# EAGLE board PM-BAT v0.5-35X22.86-DXF (EAGLE 9.6.2)
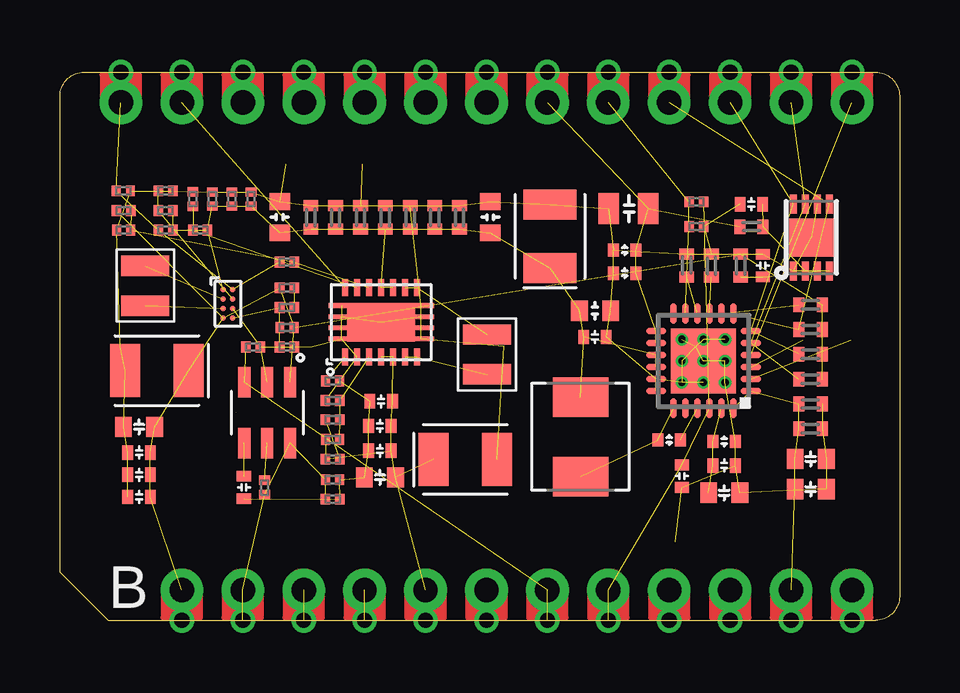
[diagram p0: board, top side]
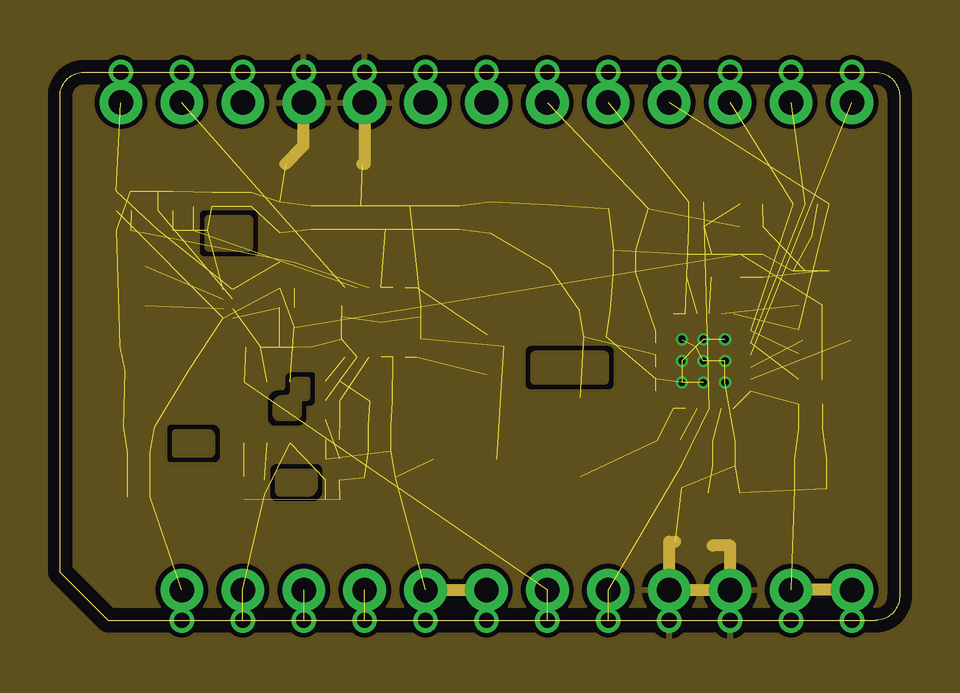
[diagram p1: board, inner layer Route2]
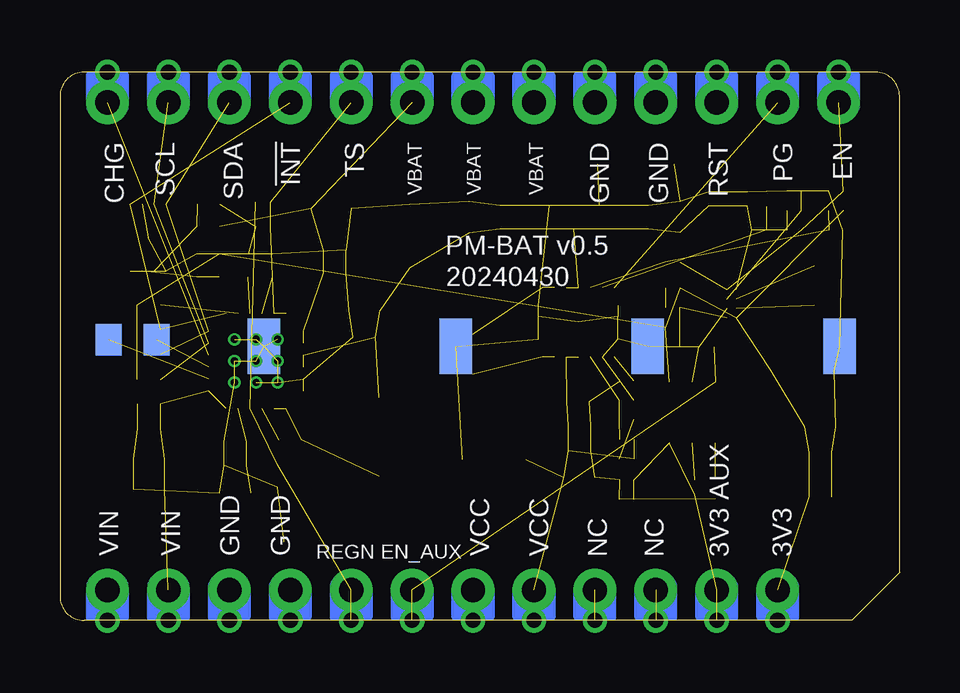
[diagram p2: board, bottom side, seen from below]

Size 35 x 22.86 mm. Coordinates in mm from the lower left corner, seen from the top.
Outline: 2,0 34,0 arc90 35,1 35,21.86 arc90 34,22.86 1,22.86 arc90 0,21.86 0,2 2,0
Copper layers (1+2*15+16): Top 0.035mm / dielectric 1.5mm / Route2 0.035mm / dielectric 0.15mm / Route15 0.035mm / dielectric 0.2mm / Bottom 0.035mm
Design rules "default *": minimum track width 4mil, minimum drill 8mil, track to track 8mil, track to pad 6mil, pad to pad 6mil, via to via 6mil, smd to smd 6mil, copper to edge 20mil, drill to drill 6mil, minimum pad ring 4mil, minimum via ring 4mil, stop-mask expansion 0.01mm, vias tented up to drill 16mil, thermal gap 10mil
Net classes: 0 default: width 0.152 mm, drill 0.203 mm, clearance 0.152 mm; 1 power: width 0.305 mm, drill 0.203 mm, clearance 0.203 mm; 3 BAT: drill 0.203 mm, clearance 0.203 mm; 4 3V3: width 0.305 mm, drill 0.203 mm, clearance 0.508 mm; 6 +3V3: width 0.203 mm, drill 0.203 mm, clearance 0.152 mm

## Footprints (pad centres in the part's own frame; a part is rotated, then mirrored left to right if it is on the bottom)
C0402_B = smd 0.457 x 0.61: 1 -0.483,0; 2 0.483,0
C-0402 = smd 0.45 x 0.55: 1 -0.47,0; 2 0.47,0
C0805 = smd 0.85 x 1.3: 1 -0.8,0; 2 0.85,0
C0402 = smd 0.45 x 0.6: 1 -0.47,0; 2 0.47,0
C0201-N = smd 0.37 x 0.45: 1 -0.295,0; 2 0.295,0
C0603 = smd 0.7 x 0.85: 1 -0.65,0; 2 0.65,0
C-0603A = smd 0.7 x 0.85: 1 -0.65,0; 2 0.65,0
CASE-B = smd 2.2 x 1.25: P$1 0,-1.32; P$2 0,1.32
1X13-CASTELLATED = drill 1.016 pad 1.778: 1 0,-15.24; 2 0,-12.7; 3 0,-10.16; 4 0,-7.62; 5 0,-5.08; 6 0,-2.54; 7 0,0; 8 0,2.54; 9 0,5.08; 10 0,7.62; 11 0,10.16; 12 0,12.7; 13 0,15.24 | drill 0.635 pad 1.016: @1 1.27,-15.24; @2 1.27,-12.7; @3 1.27,-10.16; @4 1.27,-7.62; @5 1.27,-5.08; @6 1.27,-2.54; @7 1.27,0; @8 1.27,2.54; @9 1.27,5.08; @10 1.27,7.62; @11 1.27,10.16; @12 1.27,12.7; @13 1.27,15.24
1X12-CASTELLATED = drill 1.016 pad 1.778: 1 0,-13.97; 2 0,-11.43; 3 0,-8.89; 4 0,-6.35; 5 0,-3.81; 6 0,-1.27; 7 0,1.27; 8 0,3.81; 9 0,6.35; 10 0,8.89; 11 0,11.43; 12 0,13.97 | drill 0.635 pad 1.016: @1 1.27,-13.97; @2 1.27,-11.43; @3 1.27,-8.89; @4 1.27,-6.35; @5 1.27,-3.81; @6 1.27,-1.27; @7 1.27,1.27; @8 1.27,3.81; @9 1.27,6.35; @10 1.27,8.89; @11 1.27,11.43; @12 1.27,13.97
INDUCTOR-2520 = smd 0.85 x 2: 1 -0.83,0; 2 0.83,0
INDUCTOR-4040 = smd 1.65 x 2.3: P$1 -1.65,0; P$2 1.65,0
R0201-N = smd 0.4 x 0.45: 1 -0.305,0; 2 0.305,0
R0402_B = smd 0.457 x 0.61: 1 -0.483,0; 2 0.483,0
TP-1311MM = smd 1.1 x 1.3: P$1 0,0
ELECTRON_QFN24 = smd 0.85 x 0.28: 1 -1.975,1.25; 2 -1.975,0.75; 3 -1.975,0.25; 4 -1.975,-0.25; 5 -1.975,-0.75; 6 -1.975,-1.25; 13 1.975,-1.25; 14 1.975,-0.75; 15 1.975,-0.25; 16 1.975,0.25; 17 1.975,0.75; 18 1.975,1.25 | smd 0.28 x 0.85: 7 -1.25,-1.975; 8 -0.75,-1.975; 9 -0.25,-1.975; 10 0.25,-1.975; 11 0.75,-1.975; 12 1.25,-1.975; 19 1.25,1.975; 20 0.75,1.975; 21 0.25,1.975; 22 -0.25,1.975; 23 -0.75,1.975; 24 -1.25,1.975 | smd 2.7 x 2.7: PAD 0,0 | drill 0.3 pad 0.406: PAD@1 -0.9,0.9; PAD@2 0,0.9; PAD@3 0.9,0.9; PAD@4 -0.9,0; PAD@5 0,0; PAD@6 0.9,0; PAD@7 -0.9,-0.9; PAD@8 0,-0.9; PAD@9 0.9,-0.9
TPS63020 = smd 0.25 x 0.7: 1 -1.5,-1.45; 2 -1,-1.45; 3 -0.5,-1.45; 4 0,-1.45; 5 0.5,-1.45; 6 1,-1.45; 7 1.5,-1.45; 8 1.5,1.45; 9 1,1.45; 10 0.5,1.45; 11 0,1.45; 12 -0.5,1.45; 13 -1,1.45; 14 -1.5,1.45 | smd 1.1 x 0.2: 15 -1.65,0.69; 16 -1.65,0.23; 17 -1.65,-0.23; 18 -1.65,-0.69; 19 1.65,-0.69; 20 1.65,-0.23; 21 1.65,0.23; 22 1.65,0.69 | smd 2.85 x 1.58: 23 0,0
DSBGA = smd 0.23 x 0.23: A1 -0.2,0.6; A2 0.2,0.6; B1 -0.2,0.2; B2 0.2,0.2; C1 -0.2,-0.2; C2 0.2,-0.2; D1 -0.2,-0.6; D2 0.2,-0.6
SOT-23-6 = smd 1.27 x 0.508: 1 -1.27,0.953; 2 -1.27,0; 3 -1.27,-0.953; 4 1.27,-0.953; 5 1.27,0; 6 1.27,0.953
SPARKFUN-POWERIC_TDFN-8 = smd 0.8 x 0.3: 1 -1.4,0.75; 2 -1.4,0.25; 3 -1.4,-0.25; 4 -1.4,-0.75; 5 1.4,-0.75; 6 1.4,-0.25; 7 1.4,0.25; 8 1.4,0.75 | smd 1.6 x 1.88: EP 0,0
TP_2.33X1.37 = smd 1.37 x 2.33: 1 0,0

## Placement (x,y rotation side)
C1  100pF  [C0402_B]  14.6,16.81 270 top
C2  47nF  [C-0402]  25.4,7.52 180 top
C3  10uF  [C0805]  23.72,17.17 180 top
C4  1000pF  [C0402_B]  15.63,16.81 270 top
C5  10nF  [C0402]  29.3,14.79 90 top
C6  1uF  [C0402]  28.82,17.36 180 top
C7  1000pF,25V  [C0402]  7.67,5.54 270 top
C8  0.1nF  [C0402_B]  16.66,16.81 270 top
C9  0.1uF  [C0402_B]  31.29,7.99 180 top
C10  0.1uF  [C0201-N]  11.37,5.87 0 top
C11  1000pF  [C0402_B]  31.29,9.03 180 top
C12  22uF 10V  [C0603]  9.16,16.81 90 top
C13  100nF  [C0201-N]  7.97,17.57 90 top
C14  NC  [C0201-N]  9.46,12.22 180 top
C15  2.2uF,25V  [C-0603A]  31.29,6.73 0 top
C16  22uF  [C-0603A]  3.3,8.07 180 top
C17  0.1uF  [C0402]  27.69,6.46 180 top
C18  100pF  [C0402]  3.3,6.07 180 top
C19  1nF  [C0402]  3.3,7 180 top
C20  1000pF  [C0201-N]  7.16,17.57 90 top
C21  10pF  [C0402_B]  13.56,16.81 270 top
C22  10pF  [C0201-N]  6.35,17.57 90 top
C23  1000pF  [C0402_B]  11.49,16.81 270 top
C24  0.1uF  [C0402]  3.3,5.15 180 top
C25  10nF  [C0201-N]  2.64,17.91 0 top
C26  22uF 10V  [C0603]  17.94,16.81 90 top
C27  100nF  [C0402_B]  12.53,16.81 270 top
C28  NC  [C0201-N]  11.37,7.54 0 top
C29  10pF  [C0402_B]  10.46,16.81 270 top
C30  22uF  [C-0603A]  13.34,5.96 180 top
C31  1nF  [C0402]  13.39,9.14 180 top
C32  100pF  [C0402]  13.34,8.11 180 top
C35  0.1uF  [C0402]  13.34,7.07 180 top
C36  100nF  [C0201-N]  11.37,9.98 0 top
C37  4.7uF  [C0402]  25.93,6.02 270 top
C47  100nF  [C0201-N]  2.66,16.27 180 top
C49  10uF,25V  [C-0603A]  27.69,5.32 0 top
C57  10uF  [C-0603A]  31.29,5.47 0 top
C58  0.1uF  [C0402]  22.3,11.81 0 top
C59  22uF  [C0603]  22.3,12.91 0 top
C72  0.1uF  [C-0402]  23.54,14.48 180 top
C73  1000pF  [C-0402]  23.54,15.44 180 top
C74  1000p  [C-0402]  27.69,7.47 180 top
C100  220uF,10V  [CASE-B]  20.43,16.02 0 top
C101  220uF.6V  [CASE-B]  4.04,10.41 90 top
C102  220uF,6V  [CASE-B]  16.89,6.71 270 top
J1  M13PTH-CST-R  [1X13-CASTELLATED]  17.78,21.59 90 top
J2  M12PTH-CST-R  [1X12-CASTELLATED]  19.05,1.27 270 top
L1  1.5uH  [INDUCTOR-2520]  3.56,13.95 270 top
L3  1.5uH  [INDUCTOR-2520]  17.8,11.09 270 top
L7  2.2uH  [INDUCTOR-4040]  21.7,7.65 90 top
R1  100K  [R0201-N]  8.05,11.4 0 top
R2  10K  [R0402_B]  31.29,12.13 180 top
R3  10K  [R0402_B]  31.29,13.16 180 top
R4  1.1M  [R0201-N]  11.37,6.72 180 top
R5  180K  [R0201-N]  11.37,9.18 0 top
R6  62K  [R0201-N]  11.37,8.37 180 top
R7  150  [R0402_B]  28.37,14.79 270 top
R8  510K  [R0201-N]  9.46,13.87 180 top
R9  91K  [R0201-N]  9.46,11.4 180 top
R10  10K  [R0402_B]  27.15,14.79 270 top
R11  10K  [R0201-N]  8.53,5.54 90 top
R12  10K/NC  [R0201-N]  11.37,5.05 0 top
R13  100K/NC  [R0201-N]  4.4,17.91 0 top
R14  100K  [R0201-N]  4.4,16.27 180 top
R16  100K  [R0201-N]  4.4,17.08 180 top
R17  18K  [R0201-N]  9.46,13.04 0 top
R18  10K  [R0201-N]  9.46,14.94 180 top
R23  1M  [R0201-N]  5.85,16.27 180 top
R24  NC  [R0201-N]  5.55,17.57 90 top
R28  1M  [R0201-N]  2.66,17.08 180 top
R30  4K7  [R0402_B]  31.29,10.05 180 top
R33  160R  [R0402_B]  26.13,14.79 90 top
R34  49.9K  [R0201-N]  26.53,16.42 180 top
R35  27.4K  [R0201-N]  26.53,17.45 0 top
R36  4K7  [R0402_B]  31.29,11.1 180 top
R54  1K  [R0402_B]  28.82,16.42 0 top
TP1  TP1311MM  [TP-1311MM]  32.97,11.7 180 bottom
TP2  TP1311MM  [TP-1311MM]  30.97,11.7 180 bottom
U1  BQ24195  [ELECTRON_QFN24]  26.83,10.82 180 top
U2  TPS63020  [TPS63020]  13.39,12.43 0 top
U3  TPS631011  [DSBGA]  7.01,13.2 0 top
U5  TPS22918  [SOT-23-6]  8.64,8.66 270 top
U6  SPARKFUN-POWERIC_MAX1704X  [SPARKFUN-POWERIC_TDFN-8]  31.32,15.96 90 top
U$1  TP  [TP_2.33X1.37]  2.5,11.43 0 bottom
U$2  TP  [TP_2.33X1.37]  10.5,11.43 0 bottom
U$4  TP  [TP_2.33X1.37]  18.5,11.43 0 bottom
U$5  TP  [TP_2.33X1.37]  26.5,11.43 0 bottom

## Library data of the parts
C1 = Particle; ITEM_NAME: CAP CER 100pF 50V X7R 0402 10%; ITEM_NUMBER: PT-200138
C2 = particle SZ; ITEM_NAME: CAP CER 0.1uF 16V X7R 0402 10%; ITEM_NUMBER: PT-200005
C3 C13 C14 C20 C22 C25 C28 C36 C37 C47 C58 C59 = particle SZ; ITEM_NAME: CAP CER 10uF 6.3V X5R 0603 10% Low ESR<70mohms; ITEM_NUMBER: PT-200209
C4 C23 = Particle; ITEM_NAME: CAP CER 1000PF 50V X7R 0402 10%
C5 = particle SZ; ITEM_NAME: CAP CER 10nF 16V X5R 0402 10%; ITEM_NUMBER: PT-200136
C6 = particle SZ; ITEM_NAME: CAP CER X5R 1uF 0402 10V ±10% ROHS; ITEM_NUMBER: PT-200695
C7 C15 C49 C57 = particle SZ; ITEM_NAME: CAP CER 100PF 50V C0G/NP0 0603 5%; ITEM_NUMBER: PT-200458
C8 C27 = Particle; ITEM_NAME: CAP CER 0.1UF 16V X7R 0402 10%; ITEM_NUMBER: PT-200649
C9 = Particle; ITEM_NAME: CAP CER 0.1UF 25V X7R 0402 20%; ITEM_NUMBER: PT-200690
C10 C24 C35 = particle SZ; ITEM_NAME: 0.1UF 16V X7R 0402 10%; ITEM_NUMBER: PT-200649
C11 = Particle; ITEM_NAME: CAP CER 1000PF 50V X7R 0402 10%; ITEM_NUMBER: PT-200631
C12 C26 = particle SZ; ITEM_NAME: CAP CER 0.1UF 16V X7R 0402 10%; ITEM_NUMBER: 120-00060
C16 C30 = particle SZ; ITEM_NAME: CAP CER 22UF 10V X5R 0603 20%; ITEM_NUMBER: 120-00061
C17 = RedBear; ITEM_NAME: CAP CER 0.1UF 25V X7R 0402 20%; ITEM_NUMBER: PT-200690
C18 C32 = particle SZ; ITEM_NAME: 100pF 50V X7R 0402 10%; ITEM_NUMBER: PT-200138
C19 C31 C73 = particle SZ; ITEM_NAME: 1000PF 50V X7R 0402 10%; ITEM_NUMBER: PT-200631
C21 C29 = Particle; ITEM_NAME: CAP CER 10PF 5% 50V C0G/NP0 0402; ITEM_NUMBER: 120-00038
C72 = particle SZ; ITEM_NAME: CAP CER 0.1UF 16V X7R 0402 10%; ITEM_NUMBER: PT-200649
C74 = particle SZ; ITEM_NAME: CAP CER 1000PF 50V X7R 0402 10%; ITEM_NUMBER: PT-200631
C100-C102 R4-R6 R9 R18 R24 R28 R34 R35 TP1 TP2 U2 U3 U5 = particle SZ
J1 J2 L1 L3 R7 R33 U$1 U$2 U$4 U$5 = Particle
L7 = Particle; ITEM_NAME: FIXED IND 1UH 5.8A 26 MOHM SMD 4020; ITEM_NUMBER: 155-00005
R1 R8 R13 R14 R16 R23 = particle SZ; ITEM_NAME: RES SMD 1M OHM 1% 1/16W 0402; ITEM_NUMBER: PT-201084
R2 R3 R10 = Spark; ITEM_NAME: 10K OHM 5% 1/16W 0402; ITEM_NUMBER: PT-200004
R11 R12 = particle SZ; ITEM_NAME: 10K OHM 5% 1/16W 0402; ITEM_NUMBER: PT-200004
R17 = particle SZ; ITEM_NAME: RES SMD 24K OHM 1% 1/16W 0402; ITEM_NUMBER: PT-201025
R30 R36 = Particle; ITEM_NAME: RES SMD 4K7 OHM 5% 1/16W 0402; ITEM_NUMBER: PT-200230
R54 = Particle; ITEM_NAME: RES SMD 1K OHM 5% 1/16W 0402; ITEM_NUMBER: PT-200002
U1 U6 = ELEKTRA-PMIC v0.3-35X22.86-0.8-0402

## Nets
3V3: C14.1 C16.1 C18.1 C19.1 C24.1 C101.P$1 J2.1 J2.@1 R2.1 R3.1 R7.1 R8.2 R28.2 R30.1 R36.1 U3.D1 U5.1
3V3_AUX: C10.1 J2.2 J2.@2 R11.1 R12.1 U5.6
!CE: R10.2 U1.9
!FUEL-INT: J1.4 J1.@4 R2.2 U1.7 U6.5
!RST: J1.11 J1.@11
BTST: C2.1 U1.21
CHG: J1.1 J1.@1 U1.4
EN_AUX: J2.7 J2.@7 R1.1 U5.3
ENABLE: C25.1 J1.13 J1.@13 R14.2 R18.2 U3.A2
GND: C1.1 C3.2 C4.1 C5.2 C6.2 C7.2 C8.1 C9.1 C10.2 C11.1 C12.2 C13.2 C15.2 C16.2 C17.1 C18.2 C19.2 C20.2 C21.1 C22.2 C23.1 C24.2 C25.2 C26.2 C27.1 C29.1 C30.2 C31.2 C32.2 C35.2 C36.2 C37.2 C47.2 C49.2 C57.2 C58.2 C59.2 C72.2 C73.2 C74.1 C100.P$2 C101.P$2 C102.P$2 J1.9 J1.10 J1.@9 J1.@10 J2.9 J2.10 J2.@9 J2.@10 R1.2 R5.1 R9.1 R10.1 R12.2 R13.2 R24.2 R33.2 R34.1 U1.17 U1.18 U1.PAD U1.PAD@1 U1.PAD@2 U1.PAD@3 U1.PAD@4 U1.PAD@5 U1.PAD@6 U1.PAD@7 U1.PAD@8 U1.PAD@9 U2.2 U2.15 U2.16 U2.17 U2.18 U2.19 U2.20 U2.21 U2.22 U2.23 U3.C2 U5.2 U6.1 U6.4 U6.6 U6.EP U$1.1 U$2.1 U$4.1 U$5.1
ILIM: R33.1 U1.10
N$1: J2.3 J2.@3
N$2: C17.2 C49.1 C74.2 U1.23
N$4: TP2.P$1 U1.3
N$5: C14.2 R9.2 R17.1 U3.D2
N$6: C28.2 R5.2 R6.1 U2.3
N$7: TP1.P$1 U1.2
N$8: R8.1 R17.2
N$9: R4.1 R6.2
N$10: J2.4 J2.@4
N$11: L3.1 U2.8 U2.9
N$12: L1.1 U3.B1
N$15: R13.1 R16.2 U3.B2
N$16: L3.2 U2.6 U2.7
N$17: L1.2 U3.C1
N$18: C7.1 U5.4
N$19: C36.1 U2.1
N$20: R11.2 U5.5
N$21: C47.1 R18.1 R28.1 U2.12
N$22: R23.2 R24.1 U2.13
N$48: C5.1 R7.2 U6.3
N$49: C6.1 R54.2 U6.2
OTG: R3.2 U1.8
PG: J1.12 J1.@12 U2.14
REGN: C37.1 J2.8 J2.@8 R35.2 U1.22
SCL: J1.2 J1.@2 R30.2 U1.5 U6.7
SDA: J1.3 J1.@3 R36.2 U1.6 U6.8
SW1: C2.2 L7.P$1 U1.19 U1.20
TS: J1.5 J1.@5 R34.2 R35.1 U1.11 U1.12
VBAT: C3.1 C72.1 C73.1 J1.6 J1.7 J1.8 J1.@6 J1.@7 J1.@8 R54.1 U1.13 U1.14
VCC: C28.1 C30.1 C31.1 C32.1 C35.1 C102.P$1 J2.5 J2.6 J2.@5 J2.@6 R4.2 U2.4 U2.5
VIN: C9.2 C11.2 C15.1 C57.1 J2.11 J2.12 J2.@11 J2.@12 U1.1 U1.24
VSYS: C1.2 C4.2 C8.2 C12.1 C13.1 C20.1 C21.2 C22.1 C23.2 C26.1 C27.2 C29.2 C58.1 C59.1 C100.P$1 L7.P$2 R14.1 R16.1 R23.1 U1.15 U1.16 U2.10 U2.11 U3.A1

## Tracks (layer width: path | path; a pad name or v marks a point on that pad's centre or on a via)
3V3  (15 unrouted)
  Route2 0.508: J2.@1 J2.1
  pour Route2: 9.86,10.11 10.31,10.11 arc-90 10.39,10.03 10.39,9.35 arc-90 10.24,9.19 10.16,9.19 arc90 10.03,9.07 10.03,8.66 arc-90 9.73,8.36 9.14,8.36 arc-90 8.92,8.59 8.92,8.99 arc-90 9.27,9.35 9.45,9.35 arc90 9.63,9.53 9.63,9.88 arc-90
  pour Route2: 4.83,7.92 6.17,7.92 arc-90 6.43,7.67 6.43,7.04 arc-90 6.22,6.83 4.8,6.83 arc-90 4.72,6.91 4.72,7.82 arc-90
3V3_AUX  (5 unrouted)
  pour Route2: 9.25,6.27 10.49,6.27 arc-90 10.69,6.07 10.69,5.56 arc-90 10.34,5.21 9.22,5.21 arc-90 9.02,5.41 9.02,6.07 arc-90 9.22,6.27
!CE  (1 unrouted)
!FUEL-INT  (3 unrouted)
  Route2 0.508: J1.@4 J1.4
!RST
  Route2 0.508: J1.@11 J1.11
BTST  (1 unrouted)
CHG  (1 unrouted)
  Route2 0.508: J1.@1 J1.1
EN_AUX  (3 unrouted)
ENABLE  (4 unrouted)
  Route2 0.508: J1.@13 J1.13
GND  (85 unrouted)
  Route2 0.508: 10.14,21.38 10.14,21.59 J1.10 | 10.14,21.38 10.14,19.77 9.4,19.04 | J1.@10 10.16,21.38 10.14,21.38 | J1.@9 J1.9 12.7,19.04 12.6,19.04 | J2.@10 J2.10 | J2.10 27.94,3.13 27.22,3.13 | J2.@9 J2.9 | J2.9 25.4,3.28 25.65,3.28 | J2.9 J2.10
  pour Route2 (rank 4): -3.89,30.63 44.27,30.63 44.27,-3.23 -3.89,-3.23
ILIM  (1 unrouted)
N$1  (1 unrouted)
N$2  (3 unrouted)
N$4  (1 unrouted)
N$5  (3 unrouted)
N$6  (3 unrouted)
N$7  (1 unrouted)
N$8  (1 unrouted)
N$9  (1 unrouted)
N$10  (1 unrouted)
N$11  (2 unrouted)
N$12  (1 unrouted)
N$15  (2 unrouted)
N$16  (2 unrouted)
N$17  (1 unrouted)
N$18  (1 unrouted)
N$19  (1 unrouted)
N$20  (1 unrouted)
N$21  (3 unrouted)
N$22  (2 unrouted)
N$48  (2 unrouted)
N$49  (2 unrouted)
OTG  (1 unrouted)
PG  (1 unrouted)
  Route2 0.508: J1.@12 J1.12
REGN  (4 unrouted)
SCL  (3 unrouted)
  Route2 0.508: J1.@2 J1.2
SDA  (3 unrouted)
  Route2 0.508: J1.@3 J1.3
SW1  (3 unrouted)
TS  (4 unrouted)
  Route2 0.508: J1.@5 J1.5
VBAT  (8 unrouted)
  Route2 0.508: J1.@7 J1.7 | J1.@6 J1.6 | J1.@8 J1.8
VCC  (9 unrouted)
  Route2 0.508: J2.@6 J2.6 J2.5 J2.@5
VIN  (6 unrouted)
  Route2 0.508: J2.@12 J2.12 J2.11 J2.@11
VSYS  (23 unrouted)
  pour Route2: 19.89,11.2 22.66,11.2 arc-90 22.83,11.02 22.83,10.03 arc-90 22.68,9.88 20.02,9.88 19.81,9.88 arc-90 19.66,10.03 19.66,11.02 arc-90 19.84,11.2
  pour Route2: 6.22,16.87 7.82,16.87 arc-90 8,16.69 8,15.57 arc-90 7.85,15.42 6.22,15.42 arc-90 6.07,15.57 6.07,16.71 arc-90

## Text on the board
Route2: G2
tPlace: B
bPlace: EN | PG | RST | GND | GND | VBAT | VBAT | VBAT | TS | !INT | SDA | SCL | CHG | PM-BAT v0.5 | 20240430 | 3V3 AUX | 3V3 | VCC | VCC | GND | GND | VIN | VIN | NC | NC | EN_AUX | REGN
tValues: 1.5uH | 1.5uH
Reference: 40*27mm
tDocu: NR3015T2R2M